# EAGLE board FAD1 (EAGLE 9.4.2)
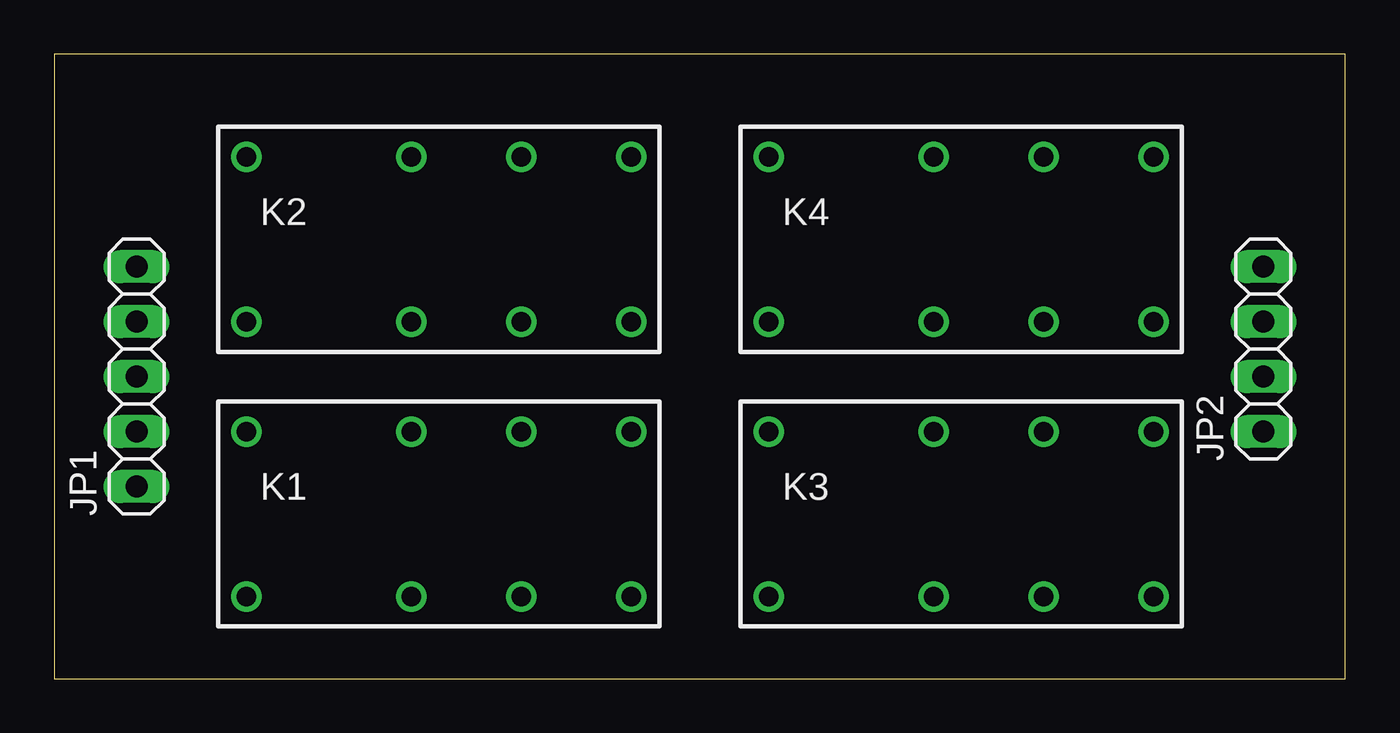
[diagram p0: board, top side]
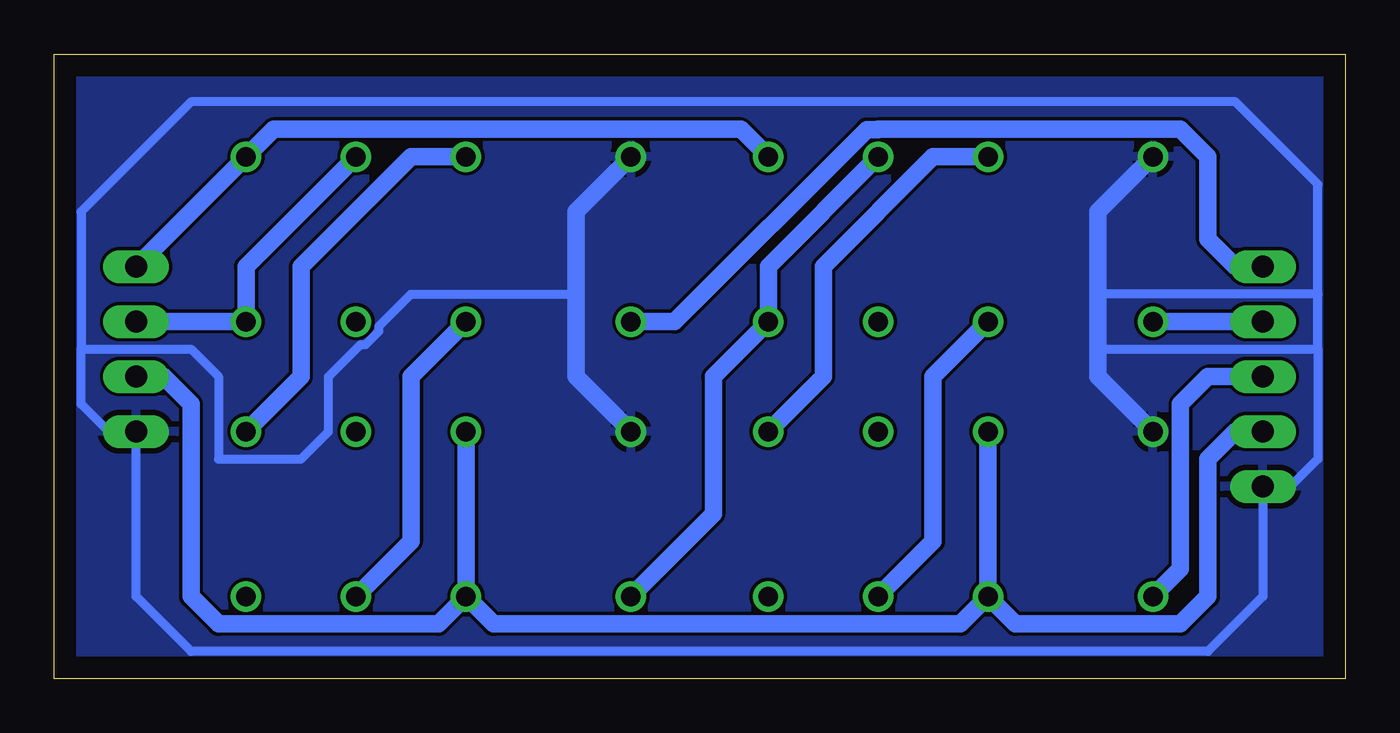
[diagram p1: board, bottom side, seen from below]

Size 59.67 x 28.88 mm. Coordinates in mm from the lower left corner, seen from the top.
Outline: 0,0 59.67,0 59.67,28.88 0,28.88 0,0
Copper layers (1*16): Top 0.035mm / dielectric 0.15mm / Bottom 0.035mm
Design rules "default": minimum track width 6mil, minimum drill 0.35mm, track to track 6mil, track to pad 6mil, pad to pad 6mil, via to via 6mil, smd to smd 6mil, copper to edge 40mil, drill to drill 6mil, minimum pad ring 10mil, minimum via ring 8mil, stop-mask expansion 4mil, vias tented up to drill 0mil, thermal gap 10mil

## Footprints (pad centres in the part's own frame; a part is rotated, then mirrored left to right if it is on the bottom)
1X05 = drill 1.016 long: 1 -5.08,0; 2 -2.54,0; 3 0,0; 4 2.54,0; 5 5.08,0
1X04 = drill 1.016 long: 1 -3.81,0; 2 -1.27,0; 3 1.27,0; 4 3.81,0
DS-BT = drill 0.9: 1 -8.89,-3.81; 4 -1.27,-3.81; 6 3.81,-3.81; 8 8.89,-3.81; 9 8.89,3.81; 11 3.81,3.81; 13 -1.27,3.81; 16 -8.89,3.81

## Placement (x,y rotation side)
JP1  [1X05]  3.81,13.97 90 top
JP2  [1X04]  55.88,15.24 90 top
K1  RELAY5V  [DS-BT]  17.78,7.62 0 top
K2  RELAY5V  [DS-BT]  17.78,20.32 0 top
K3  RELAY5V  [DS-BT]  41.91,7.62 0 top
K4  RELAY5V  [DS-BT]  41.91,20.32 0 top

## Library data of the parts
JP1 JP2 = pinhead
K1-K4 = My

## Nets
+5V: JP1.2 JP2.2 K1.4 K1.13 K3.4 K3.13
AIN: JP1.3 K1.1
BIN: JP1.4 K2.1
CIN: JP1.5 K4.1
COUT: JP2.4 K2.9 K4.9
GND: JP1.1 JP2.1 K1.16 K2.16 K3.16 K4.16
N$1: K3.9 K4.13
N$2: K1.9 K2.13
N$3: K1.6 K2.4
N$4: K3.6 K4.4
S: K2.8 K2.11 K3.1
SOUT: JP2.3 K4.8 K4.11

## Tracks (layer width: path | path; a pad name or v marks a point on that pad's centre or on a via)
+5V
  Bottom 0.813: K1.13 K1.4 | K3.13 K3.4 | K3.4 39.37,2.54 17.78,2.54 K1.4 | K3.4 41.91,2.54 52.07,2.54 53.34,3.81 53.34,12.7 54.61,13.97 JP2.2 | JP1.2 5.08,11.43 6.35,10.16 6.35,3.81 7.62,2.54 15.24,2.54 K1.4
AIN
  Bottom 0.813: K1.1 7.62,5.08 7.62,12.7 6.35,13.97 JP1.3
BIN
  Bottom 0.813: JP1.4 K2.1
CIN
  Bottom 0.813: JP1.5 5.08,19.05 6.35,20.32 6.35,24.13 7.62,25.4 21.59,25.4 21.6,25.39 22.11,25.39 31,16.51 K4.1
COUT
  Bottom 0.813: K2.9 27.94,25.4 49.53,25.4 K4.9 JP2.4
GND
  Bottom 0.406: 11.43,15.24 1.27,15.24 | 1.27,15.24 1.27,10.16 2.54,8.89 JP1.1 3.81,3.81 6.35,1.27 53.34,1.27 55.88,3.81 JP2.1 57.15,11.43 58.42,12.7 58.42,15.24 | 1.27,17.78 11.43,17.78 | 1.27,15.24 1.27,17.78 | 58.42,15.24 53.34,15.24 52.07,13.97 52.07,10.16 48.26,10.16 46.99,11.43 46.99,13.97 45.51,15.45 45.28,15.45 44.66,16.07 44.66,16.3 43.18,17.78 35.56,17.78 | 1.27,17.78 1.27,22.86 5.08,26.67 53.34,26.67 58.42,21.59 58.42,15.24
  Bottom 0.813: K1.16 11.43,13.97 11.43,15.24 11.43,17.78 11.43,21.59 K2.16 | K4.16 35.56,21.59 35.56,17.78 35.56,13.97 K3.16
  pour Bottom: 0,29.21 0,0 59.69,0 59.69,29.21
N$1
  Bottom 0.813: K4.13 43.18,24.13 48.26,19.05 48.26,13.97 K3.9
N$2
  Bottom 0.813: K2.13 19.05,24.13 24.13,19.05 24.13,13.97 K1.9
N$3
  Bottom 0.813: K2.4 19.05,13.97 19.05,6.35 K1.6
N$4
  Bottom 0.813: K4.4 43.18,13.97 43.18,6.35 K3.6
S
  Bottom 0.813: K2.11 26.67,19.05 K2.8 29.21,13.97 29.21,7.62 K3.1
SOUT
  Bottom 0.813: K4.11 50.8,19.05 K4.8 JP2.3